# Altium PCB LM-008.PcbDoc (part 2 of 2)
Units mm, origin at the board's own origin, x right, y up, seen from the top; angles counter-clockwise.
Board outline 62 x 70.16 mm, 4 copper layers (Top Layer, +5V, Signal Layer 1, Bottom Layer), stack 0.778 mm thick; 50 components, 39 nets, 213 pads, 21 vias.
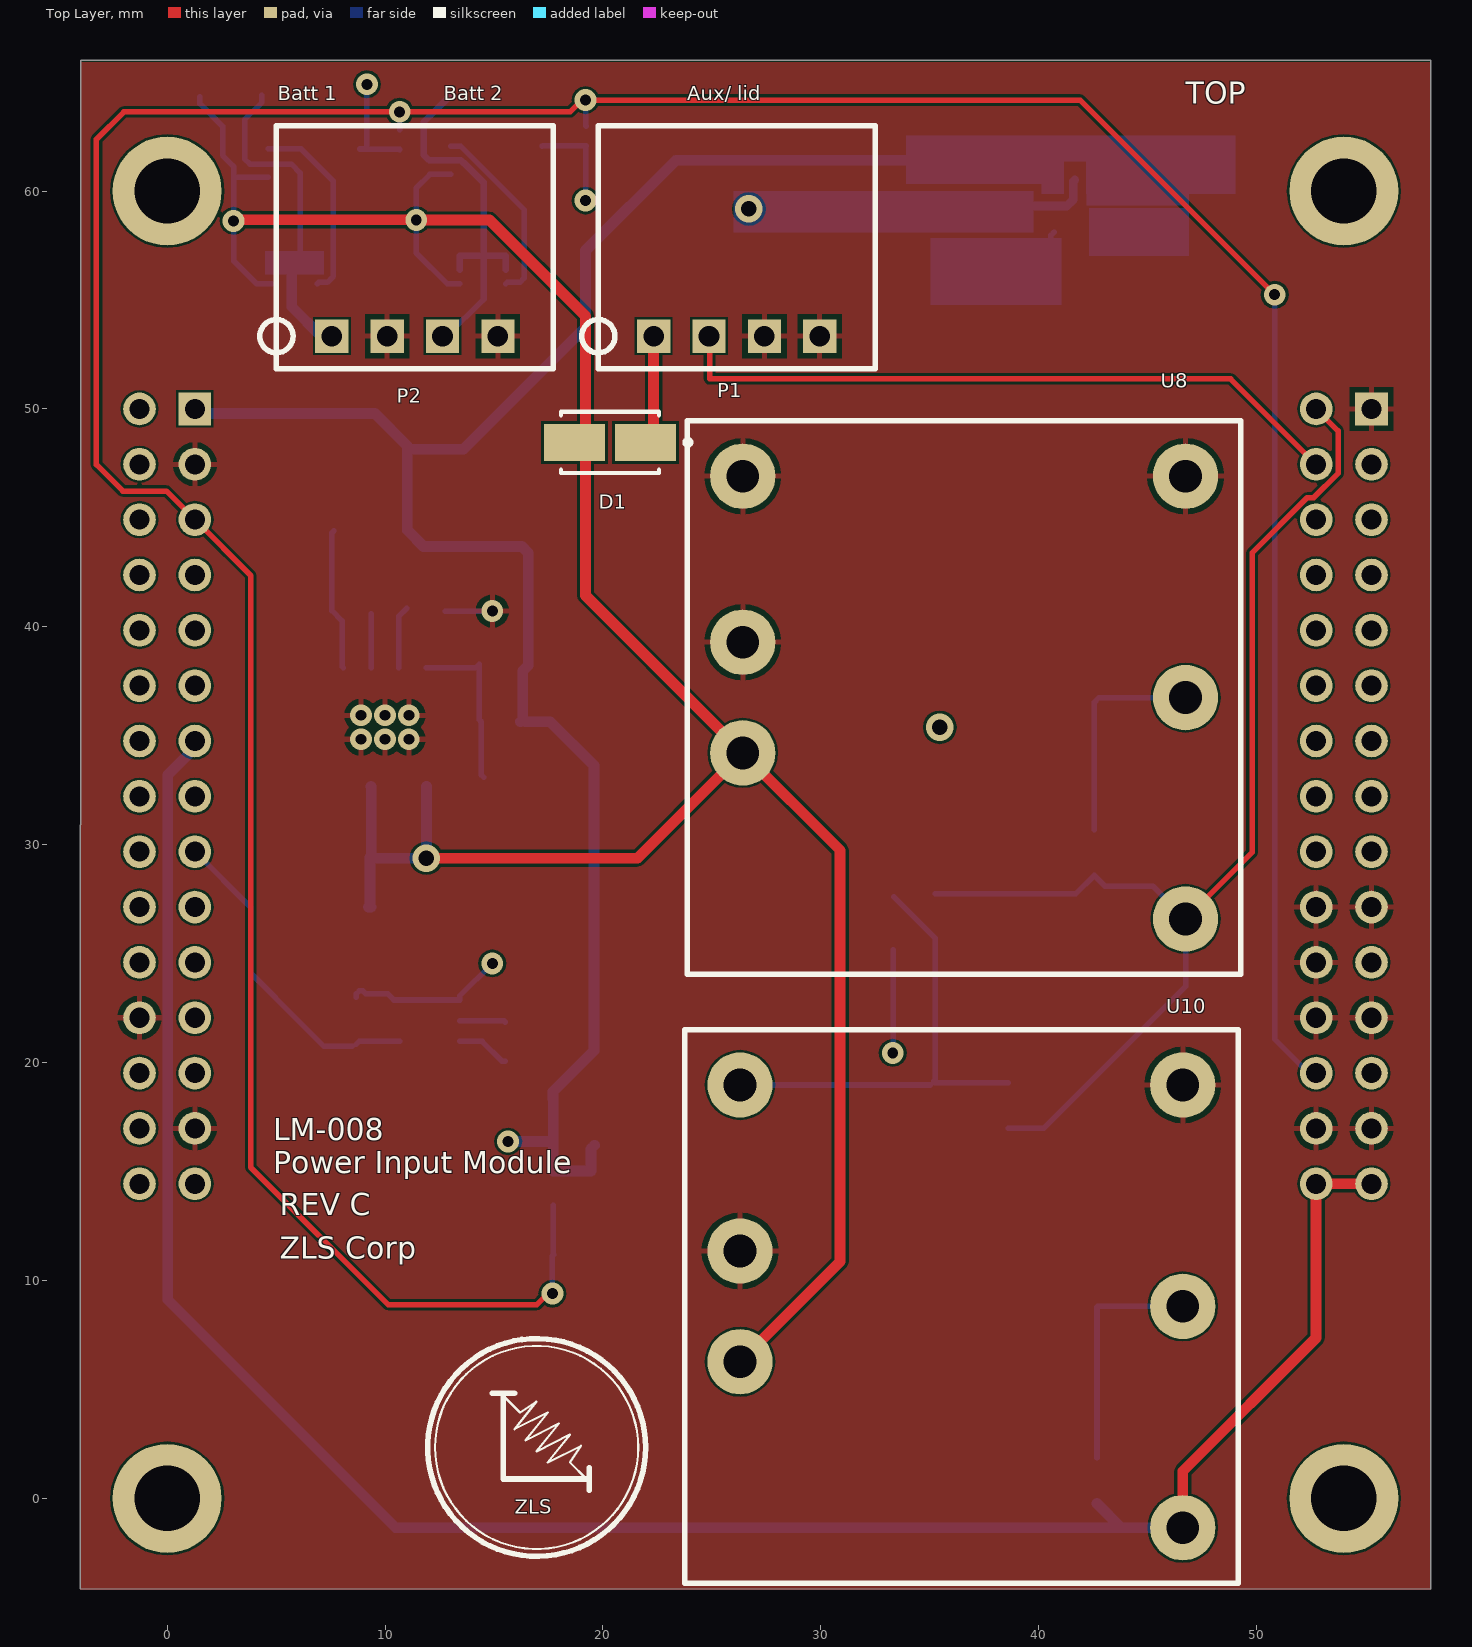
[diagram p0: Top Layer view]

## Part data (continued)
U8: library part PXB15-24WS05/NT, "DC DC CONVERTER 5V 15W", Current - Output (Max)=3A, Manufacturer="TDK-Lambda Americas Inc.", Operating Temperature="-40°C ~ 85°C", Package / Case="6-DIP Module", Supplier Part Number 1=285-2605-ND, Voltage - Input (Max)=36V, Voltage - Input (Min)=9V, Voltage - Output 1=5V, Voltage - Output 2=-, Applications="ITE (Commercial)", Category="Power Supplies - Board Mount", ComponentLink1Description=http://www.us.tdk-lambda.com/ftp/specs/ccg15.pdf, ComponentLink1URL=http://www.us.tdk-lambda.com/ftp/specs/ccg15.pdf, Control Features="Enable, Active Low", Efficiency=87%, Features="Remote On/Off, OCP, OVP", Manufacturer Part Number=CCG152405S, Mounting Type="Through Hole", Packaging=Tube, Part Status=Active, Pricing 1="1=28.5, 10=27.75 (USD)", RoHS="RoHS Compliant", Size / Dimension="1.00\" L x 1.00\" W x 0.39\" H (25.4mm x 25.4mm x 9.9mm)", Stock 1=154, Supplier 1=Digi-Key, Type="Isolated Module", Voltage - Output 3=-
U9: library part CMP-0809-00006-2, "Precision, Low Noise, Rail-to-Rail Output, Zero-Drift Operational Amplifier, 4 to 36 V, -40 to 125 degC, 5-pin SOT23 (DBV5), Green (RoHS & no Sb/Br)", Current - Supply=450µA, Manufacturer="Texas Instruments", Operating Temperature="-40°C ~ 125°C", Package / Case="SC-74A, SOT-753", Supplier Device Package=SOT-23-5, Supplier Part Number 1=296-40438-1-ND, Voltage - Supply, Single/Dual (±)="4 V ~ 36 V, ±2 V ~ 18 V", Amplifier Type=Zero-Drift, Category="Integrated Circuits (ICs)", ComponentLink1Description=http://www.ti.com/lit/ds/symlink/opa188.pdf, ComponentLink1URL=http://www.ti.com/lit/ds/symlink/opa188.pdf, Manufacturer Part Number=OPA188AIDBVR, Mounting Type="Surface Mount", Output Type=Rail-to-Rail, Packaging="Cut Tape (CT)", Part Status=Active, Pricing 1="1=2.46, 10=2.211, 100=1.7771, 500=1.46002, 1000=1.20974 (USD)", RoHS="RoHS Compliant", Slew Rate="0.8 V/µs", Stock 1=195, Supplier 1=Digi-Key
U10: library part CCG302412S, "DC DC CONVERTER 12V 30W", Current - Output (Max)=2.5A, Manufacturer="TDK-Lambda Americas Inc.", Operating Temperature="-40°C ~ 85°C", Package / Case="6-DIP Module", Supplier Part Number 1=285-2419-ND, Voltage - Input (Max)=36V, Voltage - Input (Min)=9V, Voltage - Output 1=12V, Voltage - Output 2=-, Applications="ITE (Commercial)", Category="Power Supplies - Board Mount", ComponentLink1Description=http://www.us.tdk-lambda.com/ftp/specs/ccg30.pdf, ComponentLink1URL=http://www.us.tdk-lambda.com/ftp/specs/ccg30.pdf, Control Features="Enable, Active Low", Efficiency=89%, Features="Remote On/Off, OCP, OVP", Manufacturer Part Number=CCG302412S, Mounting Type="Through Hole", Packaging=Tray, Part Status=Active, Pricing 1="1=41.1, 10=40.25 (USD)", RoHS="RoHS Compliant", Size / Dimension="1.00\" L x 1.00\" W x 0.39\" H (25.4mm x 25.4mm x 9.9mm)", Stock 1=269, Supplier 1=Digi-Key, Type="Isolated Module", Voltage - Output 3=-

## Free pads (board coordinates)
  round 5 hole 3: ""(0,0) ""(0,60) ""(54,0) ""(54,60)

## Via types
v1: diameter 1, hole 0.5, Top Layer to Bottom Layer, 18 vias
v2: diameter 1.27, hole 0.711, Top Layer to Bottom Layer, 3 vias

## Nets (pads, with @x,y where several pads share a name; then routed paths per layer and width w, separated by ;. In a path a pad name is that pad's centre, name@x,y a point inside that pad or via, vN(x,y) a via of type N, cw(c..) or ccw(c..) an arc to the next point about the centre after c; other vN are vias at no path point)
+3.3: C4.2 P3.5 P4.26 R1.2 R2.2 U3.5 | length 169.3
  Top Layer w0.254: v1(17.678,9.398) 17.476,9.398 16.968,8.89 10.134,8.89 3.835,15.189 3.835,42.355 P3.5 -0.038,46.228 -2.032,46.228 -3.25,47.446 -3.25,62.377 -1.991,63.636 v1(10.668,63.636) 18.493,63.636 19.031,64.173 v1(19.202,64.173) 41.897,64.173 v1(50.825,55.245)
  Bottom Layer w0.254: R1.2 10.668,63.623 10.681,63.636 v1(10.668,63.636) ; v1(17.678,9.398) 17.678,11.126 C4.2 17.719,11.185 U3.5 ; v1(19.202,64.173) 19.215,64.16 19.215,62.998 R2.2 ; v1(50.825,55.245) 50.825,21.082 52.387,19.52 P4.26
+5: C5.2 C10.1 C11.1 C18.2 C19.2 C20.2 L1.2 L2.1 P3.1 P4.21 R3.2 U3.1 U3.3 U7.4 U7.6 | length 102.5
  Bottom Layer w0.5: P3.1 1.486,49.784 9.532,49.784 11.017,48.299 C11.1 13.605,48.149 19.202,53.746 19.202,57.264 23.35,61.412 34.036,61.412 ; C11.1@11.044,48.122 11.017,48.095 11.017,44.435 L1.2 11.764,43.688 13.208,43.688 16.276,43.688 16.569,43.395 16.569,38.233 16.572,38.23 16.315,37.973 16.315,35.747 C10.1 ; v1(15.646,16.383) 17.546,16.383 U3.1@17.719,16.21 ; C10.1@16.445,35.645 17.568,35.645 19.583,33.63 19.583,20.544 17.702,18.664 C5.2 17.719,18.322 U3.1@17.719,16.21 ; 17.719,15.027 17.719,15.603 U3.1 U3.1@17.719,16.21 ; 17.719,15.027 19.446,15.027 19.446,16.036 U3.3 ; C18.2 38.227,61.635 38.748,61.114 40.476,61.114 40.645,60.945 U7.4@40.706,60.945 ; U7.4 U7.4@40.706,60.945 ; U7.6@42.541,60.574 42.458,60.657 42.458,61.452 42.288,61.622 41.046,61.622 40.854,61.43 40.854,61.032 40.767,60.945 U7.4@40.706,60.945 ; U7.6 42.606,60.638 42.754,60.786 L2.1 45.535,60.59 C20.2
"+5 BBB": C6.1 P4.2 R10.1 R14.1 U4.3 U4.4 U8.4 U9.5 | length 93.6
  Top Layer w0.254: U8.4 49.788,29.646 49.788,43.398 52.314,45.924 52.614,45.924 53.734,47.044 53.734,48.996 P4.2
  Signal Layer 1 w0.254: v1(14.921,24.554) 44.696,24.554 U8.4
  Bottom Layer w0.254: 8.671,22.994 8.671,23.151 8.817,23.297 8.974,23.297 9.12,23.151 10.128,23.151 10.406,22.874 U4.3 U4.4 13.424,23.057 v1(14.921,24.554) ; U9.5 41.695,27.742 R10.1 43.043,28.094 45.236,28.094 U8.4 46.736,23.495 40.225,16.984 R14.1
+12: P3.13 P4.29 P4.30 R13.1 U10.4 | length 100.3
  Top Layer w0.5: P3.13 P3.13@1.508,34.522 ; U10.4 46.609,1.245 52.73,7.366 P4.30 P4.29
  Bottom Layer w0.5: P3.13 1.587,34.76 0.025,33.198 0.025,14.091 0.025,9.119 10.49,-1.346 43.781,-1.346 ; R13.1@42.672,-0.237 43.781,-1.346 ; U10.4 43.781,-1.346
-5: C7.1 P3.17 P4.25 U4.1 | length 73
  Signal Layer 1 w0.254: P3.17 9.233,21.717 47.396,21.717 48.285,20.828 54,20.828 55.27,19.558 P4.25
  Bottom Layer w0.254: P3.17 3.835,27.115 3.835,24.105 6.162,21.778 7.19,20.75 C7.1@8.496,20.75 ; C7.1@8.671,20.835 8.81,20.974 U4.1
Aux+: D1.1 P1.1 | length 4.6
  Top Layer w0.254: P1.1@22.326,53.06 P1.1@22.352,53.086
  Top Layer w0.5: D1.1@22.326,48.514 P1.1@22.326,53.06
Batt_1_Stat: P3.8 R1.1 U1.1 | length 39.6
  Signal Layer 1 w0.254: P3.8 -3.5,44.61 -3.5,62.206 -0.809,64.897 v1(9.169,64.897)
  Bottom Layer w0.254: v1(9.169,64.897) 9.149,64.877 9.149,62.026 9.059,61.935 U1.1 8.845,61.921 10.654,61.921 R1.1
Batt_2_Stat: P3.10 R2.1 U2.1 | length 39.4
  Signal Layer 1 w0.254: P3.10 0,41.11 0,51.774 7.789,59.563 v1(19.202,59.563)
  Bottom Layer w0.254: U2.1 17.224,62.073 R2.1@19.216,62.073 ; v1(19.202,59.563) 19.215,59.576 19.215,62.072 R2.1@19.216,62.073 ; R2.1 R2.1@19.216,62.073
Battery_1: C2.2 P2.1 P3.11 Q1.1 Q1.2 Q1.5 Q1.6 U1.7 | length 40.1
  Signal Layer 1 w0.254: P3.11 3.162,37.3 4.089,38.227 4.089,51.841 5.496,53.248 P2.1@7.555,53.248
  Bottom Layer w0.254: C2.2@4.342,64.389 4.342,64.064 3.556,63.278 3.556,61.468 3.792,61.232 5.699,61.232 6.096,60.835 6.096,57.038 Q1.1 Q1.2 5.715,56.388 Q1.5 Q1.6 5.842,57.038 ; P2.1@7.066,53.34 P2.1
  Bottom Layer w0.5: 5.715,56.388 5.715,54.691 P2.1@7.066,53.34
Battery_2: C3.2 P2.3 P3.15 Q2.1 Q2.2 Q2.5 Q2.6 U2.7 | length 46
  Signal Layer 1 w0.254: P3.15 4.94,32.22 5.613,32.893 5.613,46.761 12.192,53.34 P2.3
  Bottom Layer w0.254: P2.3 12.827,53.34 14.517,55.03
  Bottom Layer w0.3: C3.2@12.953,64.338 11.767,63.153 11.767,61.662 12.017,61.412 U2.7 13.479,61.412 13.627,61.264 13.646,61.264 14.517,60.393 14.517,57.038 ; Q2.5 Q2.6 14.517,57.038 ; 14.517,55.03 14.517,57.038 ; Q2.2 Q2.1 14.517,57.038
BBB_PWR_SW: P1.2 P4.4 | length 31.2
  Top Layer w0.254: P1.2@24.892,53.086 24.892,51.382 48.808,51.382 P4.4
FB_CS0: P4.5
FB_MUX_A0: P3.28
FB_MUX_A1: P3.26
GND: C1.1 C2.1 C3.1 C4.1 C5.1 C6.2 C7.2 C11.2 C12.1 C13.1 C14.1 C16.1 C17.1 C18.1 C19.1 C20.1 P1.3 P1.4 P2.2 P2.4 P3.3 P3.24 P3.27 P4.1 P4.19 P4.20 P4.22 P4.23 P4.24 P4.27 P4.28 R4.1 R8.2 R9.2 R11.2 R12.2 U1.2 U1.3 U2.2 U3.2 U4.2 U5.6 U5.8 U5.9 U7.2 U8.1 U8.2 U8.6 U9.2 U10.2 U10.6 | length 2.2
  Bottom Layer w0.254: C14.1@12.765,40.725 v1(14.921,40.725)
  other v1: 8.89,34.841 9.99,34.841 11.09,34.841 8.89,35.941 9.99,35.941 11.09,35.941
NetC8_1: C8.1 U4.5 | length 2.1
  Bottom Layer w0.254: U4.5 15.456,21.924 C8.1
NetC8_2: C8.2 U4.6 | length 2.5
  Bottom Layer w0.254: U4.6 14.456,20.974 15.368,20.062 C8.2
NetC9_1: C9.1 U5.2 | length 2.5
  Bottom Layer w0.254: U5.2 C9.1@9.355,40.598
NetC9_2: C9.2 L1.1 U5.1 | length 6.5
  Bottom Layer w0.254: L1.1 7.555,44.319 7.555,40.748 8.028,40.275 8.028,38.173 U5.1
NetC10_2: C10.2 R3.1 R4.2 U5.4 | length 7.7
  Bottom Layer w0.254: U5.4 14.155,38.116 R3.1 14.317,35.741 C10.2 14.413,33.209 R4.2@14.517,33.105
NetC14_2: C14.2 U5.3 | length 2.9
  Bottom Layer w0.254: U5.3 10.625,40.482 C14.2@10.995,40.852
NetC15_1: C15.1 R7.2 R8.1 U7.3 | length 5.8
  Bottom Layer w0.254: C15.1 37.877,56.436 R7.2 38.725,57.284 40.26,57.284 40.558,57.582 40.558,57.961 U7.3
NetL2_2: L2.2 U7.1 | length 2.7
  Bottom Layer w0.254: U7.1 U7.1@42.629,58.086
  Bottom Layer w0.7: U7.1@42.681,58.098 45.328,58.098 L2.2
NetQ1_3: Q1.3 U1.8 | length 8.9
  Bottom Layer w0.254: U1.8 6.153,61.935 7.62,60.468 7.62,56.081 7.35,55.811 6.965,55.811 Q1.3
NetQ2_3: Q2.3 U2.8 | length 8.7
  Bottom Layer w0.254: U2.8 13.465,62.062 16.383,59.144 16.383,56.007 16.187,55.811 15.601,55.811 Q2.3
NetR9_1: R9.1 R10.2 U8.5 | length 10.1
  Bottom Layer w0.254: R10.2 42.545,36.534 42.765,36.754 U8.5
NetR11_1: R11.1 R13.2 U10.5 | length 10.9
  Bottom Layer w0.254: R13.2@42.672,1.863 R11.1 42.706,8.814 U10.5
Power_CS0: P4.9
Power_IN: C1.2 C12.2 C13.2 D1.2 Q1.4 Q2.4 U1.6 U2.6 U5.5 U5.7 U8.3 U10.3 | length 120.3
  Top Layer w0.5: v1(3.048,58.63) 3.099,58.681 11.408,58.681 v1@11.415,58.689 ; v1(11.43,58.674) 14.79,58.674 19.194,54.27 19.194,48.514 19.194,41.436 26.238,34.392 U8.3@26.238,34.036 ; v2(11.895,29.38) 21.582,29.38 U8.3@26.238,34.036 ; U10.3 30.886,10.871 30.886,29.744 U8.3 U8.3@26.238,34.036
  Bottom Layer w0.254: C1.2 1.5,64.013 2.54,62.973 2.54,61.635 3.048,61.127 3.048,60.635 ; U1.6 3.048,60.635 ; Q1.4 4.11,55.738 3.048,56.8 v1(3.048,58.63) 3.048,60.635 ; U2.6 12.053,60.762 11.43,60.139 v1(11.43,58.674) 11.43,57.166 12.858,55.738 Q2.4
  Bottom Layer w0.5: C13.2 9.355,27.14 9.305,27.19 9.305,29.414 C12.2@9.355,29.464 ; U5.7 9.366,32.655 9.366,29.475 C12.2@9.355,29.464 ; U5.5 v2(11.895,29.38) 9.439,29.38 C12.2@9.355,29.464
PWM1A: P4.8
PWM2A: P3.18
PWM2B: P3.22
RC: R12.1 R14.2 U9.1 U9.4 U10.1 | length 21.5
  Bottom Layer w0.254: U10.1 R12.1@35.018,18.974 ; U9.4@33.34,27.617 35.24,25.717 U9.1 35.24,19.196 35.179,19.135 35.23,19.084 R14.2
SINE_CS0: P3.21
SPI0_MISO: P4.12
SPI0_MOSI: P4.10
SPI0_SCLK: P4.14
Sys_Pwr_Enable: P3.14 U9.3 | length 87.1
  Signal Layer 1 w0.254: P3.14 -3.023,33.007 -3.023,7.047 0.976,3.048 30.759,3.048 33.299,5.588 v1(33.299,20.447)
  Bottom Layer w0.254: v1(33.299,20.447) 33.32,20.467 U9.3@33.32,25.171
ZH: C15.2 C16.2 C17.2 P4.17 R7.1 U7.5 | length 64.9
  Signal Layer 1 w0.254: 27.432,59.182 29.235,59.182 33.172,55.245 33.172,42.164 44.12,31.216 53.734,31.216 P4.17
  Bottom Layer w0.254: v2@26.441,59.209 C17.2 C16.2 ; C16.2@32.004,59.082 35.091,59.082 35.206,59.197 C15.2@35.206,59.236
  Bottom Layer w0.4: C15.2@35.206,59.236 C15.2 38.227,59.236 38.302,59.311 41.286,59.311 41.581,59.606 41.581,60.434 U7.5
  other v2: 26.695,59.182
pads on no net: P3.2 P3.4 P3.6 P3.7 P3.9 P3.12 P3.16 P3.19 P3.20 P3.23 P3.25 P3.29 P3.30 P4.3 P4.6 P4.7 P4.11 P4.13 P4.15 P4.16 P4.18 U1.4 U1.5 U2.3 U2.4 U2.5 U3.4
copper on no net:
  other v2: 35.458,35.391

## Polygon pours and split planes (outlines as drawn)
GND on Bottom Layer "GND_L04_P002" (solid, pour order 2): 58,65.901 58,-4.099 -3.873,-4.099 -3.873,65.901
GND on Signal Layer 1 "GND_L03_P012" (solid, pour order 12): -4,66.104 -4,-4 58,-4 58,66.104
GND on Top Layer "GND_L01_P000" (solid, pour order 0): -4,65.903 -4,-4.201 58,-4.201 58,65.903
+5 on +5V (split plane): 57.49,-3.651 -3.489,-3.628 -3.464,65.488 57.49,65.491

## Other copper
Bottom Layer:
  region net NetL2_2: 42.316,59.207 46.888,59.207 46.888,57.023 42.316,57.023
  region net Battery_1: 4.495,57.226 4.495,56.185 7.188,56.185 7.188,57.226
  region net +5: 42.183,59.868 42.206,59.844 42.206,59.36 46.888,59.36 46.888,59.868 49.022,59.868 49.022,60.122 49.022,62.535 33.909,62.535 33.909,60.325 40.132,60.325 40.132,59.868 41.151,59.868 41.151,61.368 42.183,61.368
  region net ZH: 39.751,59.995 39.751,58.115 25.995,58.115 25.995,59.995
  region net NetC15_1: 35.052,57.836 41.021,57.836 41.021,54.788 35.052,54.788
  region: 33.274,59.309
  region: 33.274,59.309

## Silkscreen, mask and mechanical layers (free items; w line width, h text height)
Top Overlay:
  circle w0.254: c16.955,2.339 r5
  circle w0.1: c16.955,2.339 r4.663
  lines w0.1: 15.431,4.701 16.193,3.939 16.955,4.447 15.939,3.177 17.463,3.939 16.447,2.669 17.971,3.431 16.955,2.161 18.479,2.923 17.463,1.653 18.987,2.415 18.479,1.653 19.241,0.891
  lines w0.254: 14.923,4.828 15.939,4.828 ; 15.431,4.701 15.431,0.891 19.241,0.891 ; 19.368,0.383 19.368,1.399
  text "Batt 1" at 5.08,64.16 h0.65
  text "Batt 2" at 12.7,64.16 h0.65
  text "Aux/ lid" at 23.876,64.16 h0.65
  text "TOP" at 46.736,64.008 h1
  text "LM-008 / Power Input Module" at 4.878,14.934 h1
  text "REV C" at 5.156,13 h1
  text "ZLS Corp" at 5.156,11 h1
  text "ZLS" at 15.939,-0.709 h0.65

## Dimensions
54,0 to 54,60 on Mechanical 13
0,0 to 54,0 on Mechanical 13
0,0 to -4,-4.138 on Mechanical 13
-4.007,-4.138 to -4.007,65.862 on Mechanical 13
-4,-4.201 to 58,-4.201 on Mechanical 13